# Altium PCB TMP100_SMD_TO_HDR.PcbDoc
Units mil, origin at the board's own origin, x right, y up, seen from the top; angles counter-clockwise.
Board outline 395 x 395 mil, 2 copper layers (Top Layer, Bottom Layer); 4 components, 6 nets, 18 pads, 0 vias.
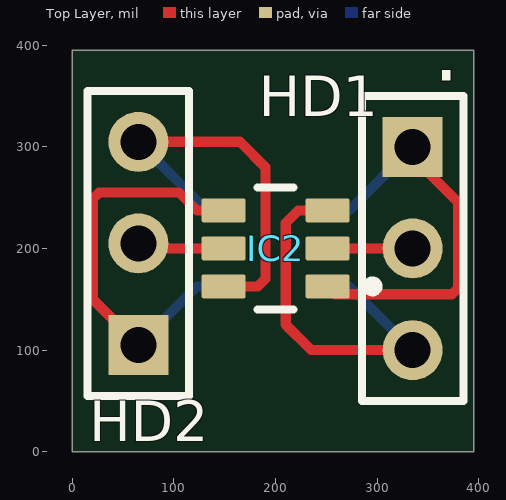
[diagram p0: Top Layer view]
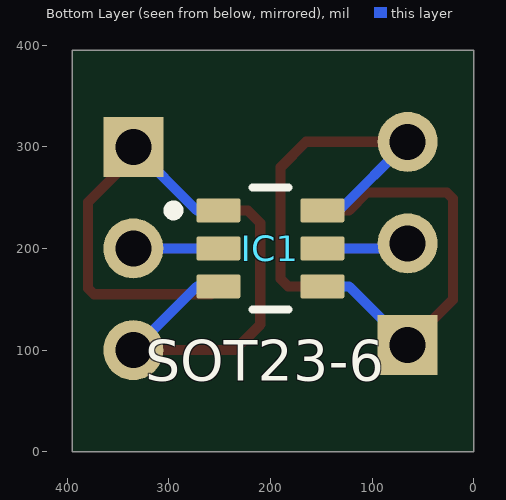
[diagram p1: Bottom Layer view, seen from below]

## Layer stack, top to bottom
Top Solder: solder mask 0.4, Solder Resist, Dk 3.5
Top Layer: signal copper 1.4
Dielectric 1: dielectric 12.6, FR-4, Dk 4.8
Bottom Layer: signal copper 1.4
Bottom Solder: solder mask 0.4, Solder Resist, Dk 3.5

## Board outline
0,0 395,0 395,395 0,395

## Design rules (kind name [scope] priority, off if disabled: settings)
Clearance [All] p1: gap=10 ignorepadtopadclearanceinfootprint=FALSE except(0: Arc-Hole Track-Hole SMDPad-Hole THPad-Hole Via-Hole Fill-Hole Poly-Hole Region-Hole Text-Hole)
PolygonConnect [All] p1: connectstyle=Relief reliefconductorwidth=10 reliefentries=4 polygonreliefangle="90 Angle" airgapwidth=10
RoutingVias [All] p1: holewidth=28 width=50 viastyle="Through Hole" minholewidth=28 minwidth=50 maxholewidth=28 maxwidth=50
SolderMaskExpansion [All] p1: expansion=4 istentingtop=FALSE
Width [All] p1: maxlimit=10 minlimit=10 preferedwidth=10
30 further rules are at their usual default settings.

## Components (designator, comment, footprint, x,y, rotation, side; value= is the part's Value field where it differs from the comment)
HD1 "Header 3" HDR1X3 335,300 r270 top
HD2 "Header 3" HDR1X3 65,104.99 r90 top
IC1 "SOT23-6" FP-DBV0006A-MFG 200,200 r180 bottom
IC2 "SOT23-6" FP-DBV0006A-MFG 200,200 r180 top

## Footprints (in the part's own frame and the unit in brackets; to place one, negate y for a bottom-side part, rotate by r counter-clockwise, add the part's x,y. Pads: shape width x height; smd on the part's side, far side on the other; paste and mask are expansions set on the pad)
FP-DBV0006A-MFG [mm]
  rrect17% 1.1x0.6 smd paste+0 mask+0: 1(-1.3,0.95) 2(-1.3,0) 3(-1.3,-0.95) 4(1.3,-0.95) 5(1.3,0) 6(1.3,0.95)
  silkscreen extent -2.55,-1.53 0.45,1.53, body extent -1.4,-1.45 1.4,1.45, height 1.45
HDR1X3 [mm] "Connector; Header; 3 Position"
  rect 1.5x1.5 hole 0.9: 1(0,0)
  round 1.5 hole 0.9: 2(2.54,0) 3(5.08,0)
  silkscreen extent -1.27,-1.27 6.35,1.27

## Part data
HD1 HD2: "Header, 3-Pin", LatestRevisionDate=17-Jul-2002, LatestRevisionNote="Re-released for DXP Platform.", Publisher="Altium Limited"
IC1 IC2: library part CMP-04948-000006-1, "SENSOR DIGITAL -55C-125C SOT23-6", Ambient Temperature Range High=+125°C, Ambient Temperature Range Low=-55°C, Manufacturer="Texas Instruments", Manufacturer Part Number=TMP100NA/3K, Max Junction Temp=+150°C, Max Supply Voltage=5.5V, Min Supply Voltage=2.7V, Operating Supply Current=45-150uA, Package=DBV0006A, Temperature="-55°C to +125°C", Automotive=No, Category=IC, ComponentLink2Description=Datasheet, ComponentLink2URL=http://www.ti.com/lit/ds/symlink/tmp100.pdf, Device Class L1=Sensors, Device Class L2="Temperature and Humidity Sensors", Device Class L3=unset, Digikey Description="SENSOR DIGITAL -55C-125C SOT23-6", Height=1.45mm, Interface=I2C,2-Wire,SMBus, Ipc Land Pattern Name=SOT95P280X145-6, Lead Free=Yes, Mouser Description="Board Mount Temperature Sensors Digital Temp Sensor w/I2C Ser Interface", Octopart=https://octopart.com/tmp100na%2F3k-texas+instruments-848964, Resolution=12bits, RoHS=TRUE, Sensor Output=I2C,SMBus, Standoff Height=0mm, Temperature Range High=+125°C, Temperature Range Low=-55°C

## Nets (pads, with @x,y where several pads share a name; then routed paths per layer and width w, separated by ;. In a path a pad name is that pad's centre, name@x,y a point inside that pad or via, vN(x,y) a via of type N, cw(c..) or ccw(c..) an arc to the next point about the centre after c; other vN are vias at no path point)
NetHD1_1: HD1.1 IC1.1 IC2.1 | length 401.3
  Top Layer w10: IC2.1 258.78,155 373.67,155 379.53,160.86 379.53,245.47 335,290 HD1.1
  Bottom Layer w10: IC1.1 272.4,237.4 HD1.1
NetHD1_2: HD1.2 IC1.2 IC2.2 | length 167.6
  Top Layer w10: IC2.2 HD1.2
  Bottom Layer w10: IC1.2 HD1.2
NetHD1_3: HD1.3 IC1.3 IC2.3 | length 391.4
  Top Layer w10: IC2.3 222.4,237.4 210,225 210,125 235,100 HD1.3
  Bottom Layer w10: IC1.3 272.4,162.6 HD1.3
NetHD2_1: HD2.1 IC1.4 IC2.4 | length 408.3
  Top Layer w10: HD2.1 20.47,149.52 20.47,249.14 26.33,255 105,255 122.6,237.4 IC2.4
  Bottom Layer w10: HD2.1 122.6,162.6 IC1.4
NetHD2_2: HD2.2 IC1.5 IC2.5 | length 171.8
  Top Layer w10: HD2.2 69.99,200 IC2.5
  Bottom Layer w10: HD2.2 69.99,200 IC1.5
NetHD2_3: HD2.3 IC1.6 IC2.6 | length 401.4
  Top Layer w10: HD2.3 165.01,304.99 190,280 190,170 182.6,162.6 IC2.6
  Bottom Layer w10: HD2.3 132.59,237.4 IC1.6

## Silkscreen, mask and mechanical layers (free items; w line width, h text height)
Top Overlay:
  text "." at 355,365 h60